# Altium PCB WAB_1_1_r3.PcbDoc (part 3 of 3)
Units mil, origin at the board's own origin, x right, y up, seen from the top; angles counter-clockwise.
Board outline 2714.17 x 3100 mil, 6 copper layers (TopLayer, GroundPlane1, MidLayer1, MidLayer2, GroundPlane2, BottomLayer), stack 59.8 mil thick; 41 components, 283 nets, 779 pads, 570 vias.
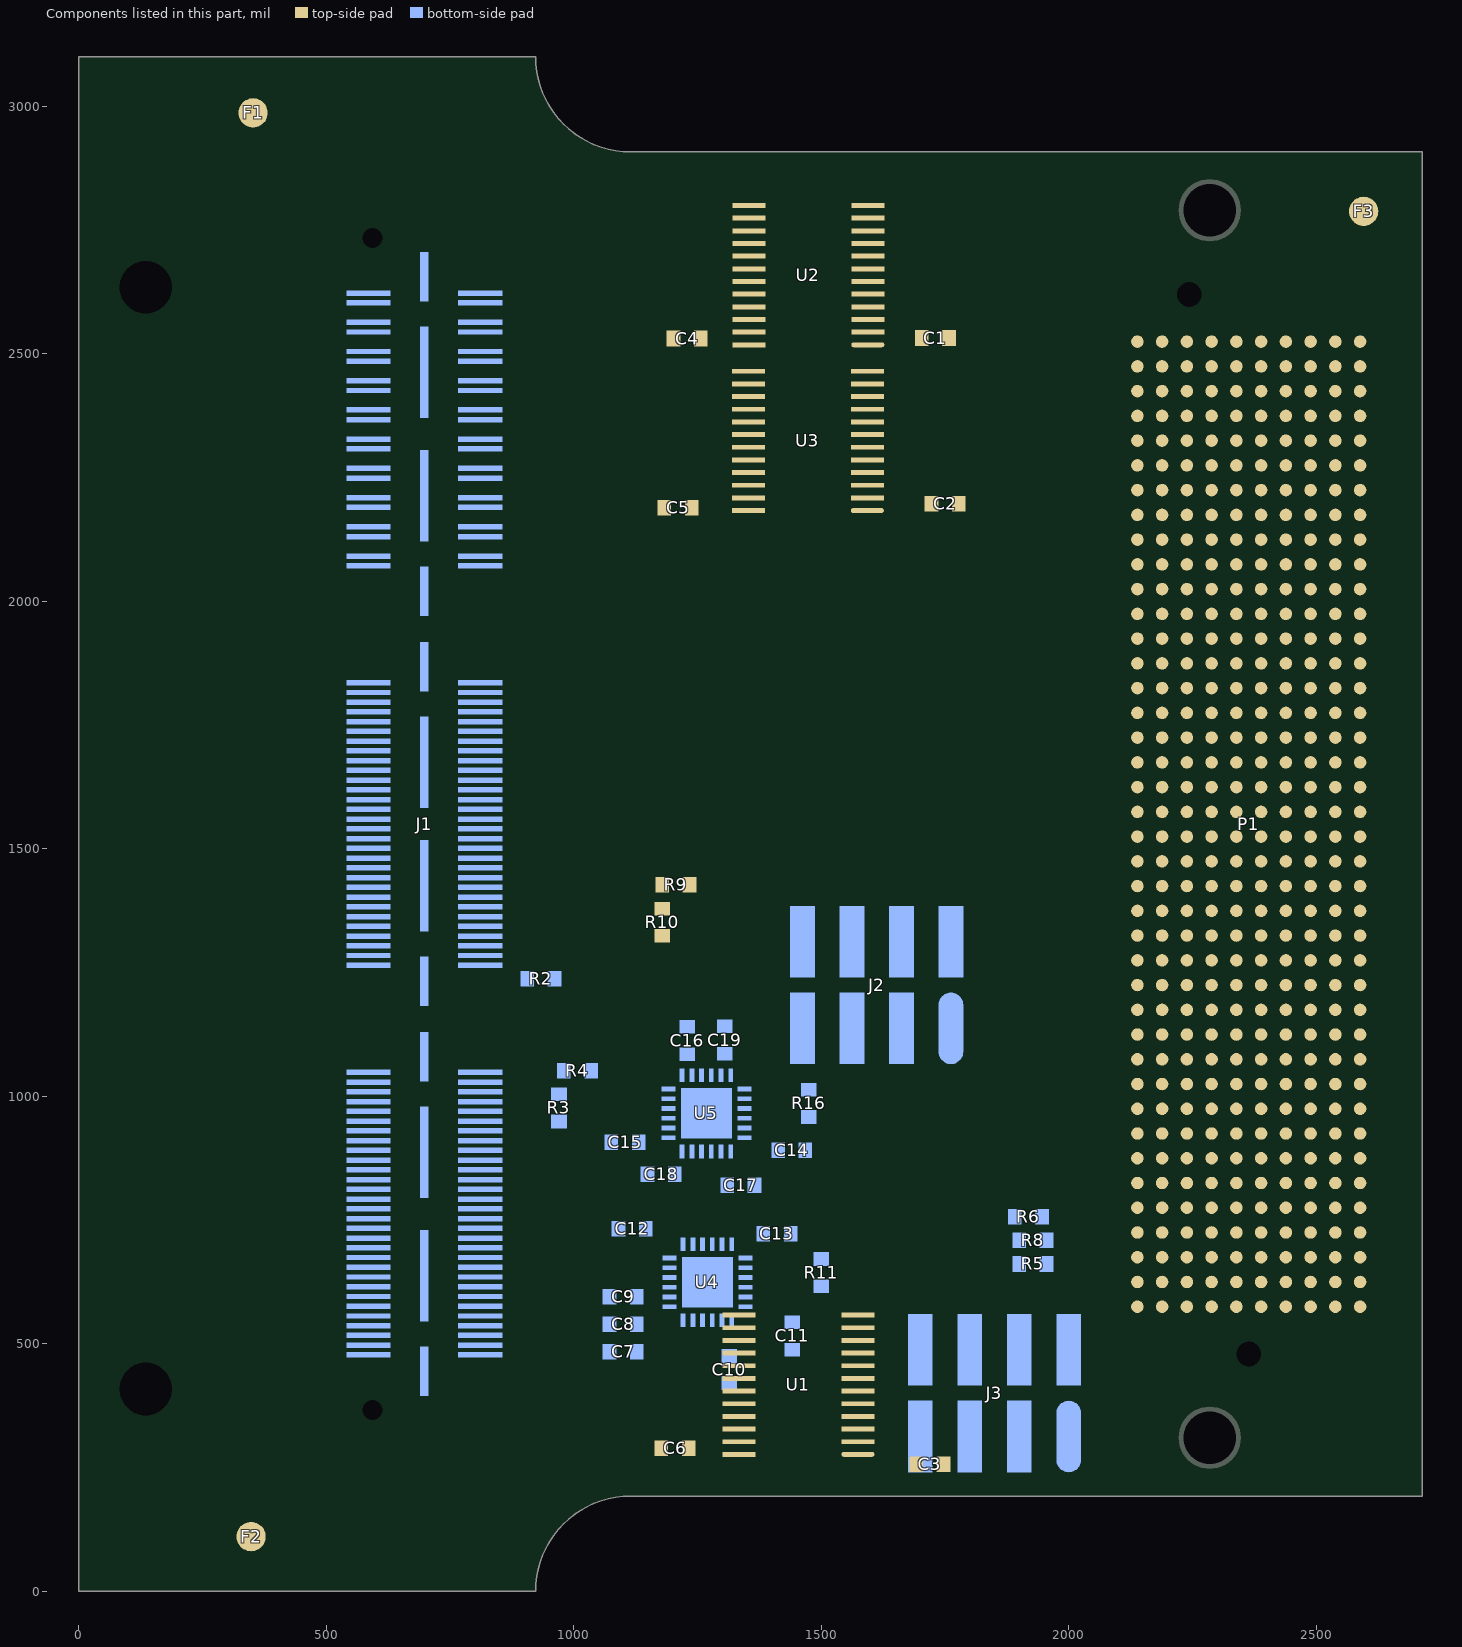
[diagram p7: the components of this part, seen from the top]

## Silkscreen, mask and mechanical layers (free items; w line width, h text height) (continued)
Notes:
  lines w5: 3077,2058.75 4716,2058.75 ; 3077,2158.05 4716,2158.05 ; 3017,1414 ccw(c3049,1414) 3049,1382 4744,1382 ccw(c4744,1414) 4776,1414 4776,2249 ccw(c4744,2249) 4744,2281 3049,2281 ccw(c3049,2249) 3017,2249 3017,1414
  text "- Isola FR402, Dk @ 1 MHz = 4.6" at 3021,2868.46 h59.06
  text "- Controlled Dielectric: 50 Ohm trace, top & bottom = 11.832 mil" at 3021,2794.89 h59.06
  text "- OK to panel; de-panel after assembly" at 3021,2722.58 h59.06
  text "- See file \"WAB_1_1_r3 PCB Stackup.xls\" for stackup specifications" at 3021,2649.06 h59.06
  text "- Contact: Ryan Guerra (315) 857-7693" at 3021,2576.8 h59.06
  text "- Lead-Free Solder ONLY" at 3021,2493.4 h59.06
  text "- AOI on all parts; X-ray inspection for bridges on J1 required" at 3021,2430.92 h59.06
  text "- Please consult manufacturing notes for AT 17721-2 concerning J3 footprint; apply to J1 here" at 3021,2358 h59.06
  text "Layer Stack Up Detail for: WAB_1_1_r1.3.PcbDoc" at 3077,2194.03 h35
  text "Layer" at 3077,2121.05 h23
  text "Content" at 3647.2,2082.56 h25.59
  text "Name" at 3077,2075.05 h23
  text "1oz" at 3676.73,2013.66 h35.43
  text "TopLayer" at 3077,2009.43 h32
  text "GroundPlane1" at 3077,1915.78 h32
  text "1oz" at 3676.73,1915.24 h35.43
  text "MidLayer1" at 3077,1822.14 h32
  text "1oz" at 3676.73,1816.81 h35.43
  text "MidLayer2" at 3077,1728.49 h32
  text "1oz" at 3676.73,1718.39 h35.43
  text "GroundPlane2" at 3077,1634.84 h32
  text "1oz" at 3676.73,1619.96 h35.43
  text "BottomLayer" at 3077,1541.2 h32
  text "1oz" at 3676.73,1521.54 h35.43
DrillDrawing:
  text ".Legend" at 3084,746 h30

## Dimensions
0,3100 to 922.83,3100 on Dimensions
0,3100 to 0,0 on Dimensions
2714.17,2908.27 to 2714.17,191.73 on Dimensions
0,3100 to 2714.17,2908.27 on Dimensions

## Text inside footprints (layer, text, board x,y; h text height)
J2: BottomOverlay "1" at 1757,1032 h20 r270; BottomOverlay "5" at 1757,1412 h20 r270
J3: BottomOverlay "5" at 1995,587.37 h20 r270; BottomOverlay "1" at 1995,207.37 h20 r270
U4: BottomOverlay "*" at 1344.06,508.14 h50 r270
U5: BottomOverlay "*" at 1342.06,849.5 h50 r270